# Allegro board test-bluetooth.brd
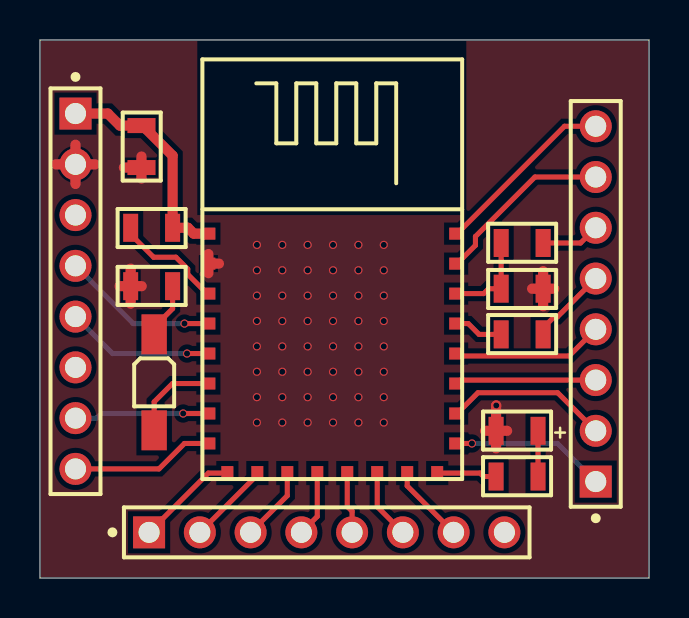
[diagram p0: board, top side]
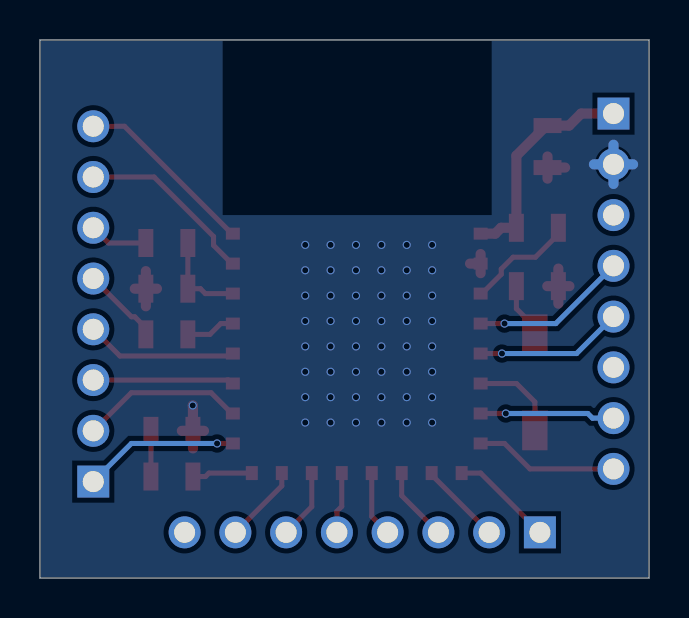
[diagram p1: board, bottom side, seen from below]

Outline 30.48 x 26.92 mm; copper layers: TOP, BOTTOM. Coordinates in mm from the lower left corner of the outline.
Outline path: 0,26.92 30.48,26.92 30.48,0 0,0 0,26.92

## Placement (name value [footprint] x y rotation side)
C1  0.1uF  [0805]  5.08 21.59 270 top
D1  LED  [0805]  23.88 7.37 0 top
J1  8 HEADER  [H-8]  1.78 23.24 270 top
J2  8 HEADER  [H-8]  27.81 4.83 90 top
J3  8 HEADER  [H-8]  5.46 2.29 0 top
R1  1K  [0805]  24.13 16.76 0 top
R2  10K  [0805]  5.59 17.53 180 top
R3  22  [0805]  24.13 12.19 0 top
R4  10K  [0805]  5.59 14.61 0 top
R5  2K  [0805]  24.13 14.48 180 top
R6  1K  [0805]  23.88 5.08 0 top
SW1  SW PUSHBUTTON  [KEY-3-6]  5.71 12.19 270 top
U1  -  [CC2540-MODULE]  8.13 4.95 0 top

## Library data of the parts
C1 = CAP NP
D1 = LED
J1-J3 = 8 HEADER
R1-R6 = R
SW1 = SW PUSHBUTTON
U1 = CC2540-MODULE

## Footprints (pads in the part's own frame, mm; a bottom-side part is the same pattern mirrored in y, then rotated)
0805
  rect 0.75x1.4 smd: 1(-1.05,0) 2(1.05,0)
CC2540-MODULE
  rect 0.7x0.6 smd: 1(0.3,12.28) 2(0.3,10.78) 3(0.3,9.28) 4(0.3,7.78) 5(0.3,6.28) 6(0.3,4.78) 7(0.3,3.28) 8(0.3,1.78) 17(12.7,1.78) 18(12.7,3.28) 19(12.7,4.78) 20(12.7,6.28) 21(12.7,7.78) 22(12.7,9.28) 23(12.7,10.78) 24(12.7,12.28)
  rect 0.6x0.7 smd: 9(1.25,0.3) 10(2.75,0.3) 11(4.25,0.3) 12(5.75,0.3) 13(7.25,0.3) 14(8.75,0.3) 15(10.25,0.3) 16(11.75,0.3)
H-8
  rect 1.6x1.6 hole 1.05: 1(0,0)
  round 1.6 hole 1.05: 2(2.54,0) 3(5.08,0) 4(7.62,0) 5(10.16,0) 6(12.7,0) 7(15.24,0) 8(17.78,0)
KEY-3-6
  rect 2x1.27 smd: 1(0,0) 2(4.8,0)

## Nets
GND: C1.2 D1.1(CATHODE) J1.2 R4.1 R5.1 U1.2(GND)
VDD3.3: C1.1 J1.1 R2.1 U1.1(VCC)
P0.0: J2.8 U1.24(P0.0)
P0.1: J2.7 U1.23(P0.1)
P0.4: J2.4 U1.20(P0.4)
P0.5: J2.3 U1.19(P0.5)
P0.6: J2.2 U1.18(P0.6)
P0.7: J2.1 U1.17(P0.7)
P1.6: J1.8 U1.8(P1.6)
P1.7: J1.7 U1.7(P1.7)
P2.1: J1.5 U1.5(P2.1/DD)
P2.2: J1.4 U1.4(P2.2/DC)
N00432: R2.2 U1.3(NRST)
N00495: SW1.2 U1.6(P2.0)
N00527: R4.2 SW1.1
N00595: R6.1 U1.16(P1.0)
N00680: R1.1 R5.2 U1.22(RX/P0.2)
N00684: R3.1 U1.21(TX/P0.3)
N00768: D1.2(ANODE) R6.2
N01274: J3.1 U1.9(USB+/SCL)
N01286: J3.2 U1.10(USB-/SDA)
N01298: J3.3 U1.11(P1.5)
N01310: J3.4 U1.12(P1.4)
N01322: J3.5 U1.13(P1.3)
N01334: J3.6 U1.14(P1.2)
N01346: J3.7 U1.15(P1.1)
N02048: J2.6 R1.2
N02052: J2.5 R3.2

Pads without a net: J1 3 6; J3 8

## Via types
v1: diameter 0.406, hole 0.305, TOP to BOTTOM, 53 vias

## Routing (per net, layer and track width the routed paths; a pad name or vN(x,y) marks a point on that pad's centre or on a via; arc(x,y) is an arc through that point)
GND: length 20.3
  TOP w0.508: 4.54,13.73 R4.1 ; R4.1 5.09,14.61 ; R4.1 4.54,15.48 ; R4.1 3.98,14.61 ; v1(22.83,8.64) 22.83,8.63 D1.1 ; 24.63,14.48 R5.1 ; R5.1 25.18,15.36 ; R5.1 25.18,13.6 ; R5.1 25.73,14.48 ; C1.2 5.08,21.09 ; C1.2 4.2,20.54 ; C1.2 5.08,19.99 ; 1.78,19.72 J1.2 ; J1.2 1.78,21.68 ; J1.2 0.8,20.7 ; J1.2 2.76,20.7 ; D1.1 23.38,7.37 ; D1.1 22.83,6.49 ; D1.1 22.27,7.37 ; U1.2 8.43,16.21 ; U1.2 8.43,15.25 ; U1.2 8.96,15.73
  BOTTOM w0.508: J1.2 1.78,21.68 ; J1.2 0.8,20.7 ; J1.2 2.76,20.7 ; J1.2 1.78,19.72
  vias: v1(10.86,16.67) v1(10.86,15.4) v1(10.86,14.13) v1(10.86,12.86) v1(10.86,11.59) v1(10.86,10.32) v1(10.86,9.05) v1(10.86,7.78) v1(12.13,16.67) v1(12.13,15.4) v1(12.13,14.13) v1(12.13,12.86) v1(12.13,11.59) v1(12.13,10.32) v1(12.13,9.05) v1(12.13,7.78) v1(13.4,16.67) v1(13.4,15.4) v1(13.4,14.13) v1(13.4,12.86) v1(13.4,11.59) v1(13.4,10.32) v1(13.4,9.05) v1(13.4,7.78) v1(14.67,16.67) v1(14.67,15.4) v1(14.67,14.13) v1(14.67,12.86) v1(14.67,11.59) v1(14.67,10.32) v1(14.67,9.05) v1(14.67,7.78) v1(15.94,16.67) v1(15.94,15.4) v1(15.94,14.13) v1(15.94,12.86) v1(15.94,11.59) v1(15.94,10.32) v1(15.94,9.05) v1(15.94,7.78) v1(17.21,16.67) v1(17.21,15.4) v1(17.21,14.13) v1(17.21,12.86) v1(17.21,11.59) v1(17.21,10.32) v1(17.21,9.05) v1(17.21,7.78)
VDD3.3: length 11.3
  TOP w0.508: J1.1 3.4,23.24 4,22.64 C1.1 5.13,22.64 6.64,21.13 R2.1 7.4,17.53 7.7,17.23 U1.1
P0.0: length 9.2
  TOP w0.254: U1.24 20.88,17.23 26.25,22.61 J2.8
P0.1: length 9
  TOP w0.254: J2.7 24.77,20.07 21.79,17.09 21.79,16.65 20.88,15.73 U1.23
P0.4: length 7.6
  TOP w0.254: U1.20 20.88,11.23 21,11.11 26.48,11.11 J2.4
P0.5: length 7.1
  TOP w0.254: U1.19 20.88,9.73 21.05,9.91 J2.3
P0.6: length 8.2
  TOP w0.254: U1.18 20.88,8.23 21.92,9.27 25.91,9.27 J2.2
P0.7: length 7.8
  TOP w0.254: U1.17 v1(21.62,6.73)
  BOTTOM w0.254: J2.1 25.91,6.73 v1(21.62,6.73)
P1.6: length 7.2
  TOP w0.254: J1.8 5.96,5.46 7.23,6.73 U1.8
P1.7: length 6.7
  TOP w0.254: U1.7 v1(7.17,8.23)
  BOTTOM w0.254: v1(7.17,8.23) 3.06,8.23 2.83,8 J1.7
P2.1: length 7.4
  TOP w0.254: U1.5 v1(7.36,11.23)
  BOTTOM w0.254: J1.5 3.63,11.23 v1(7.36,11.23)
P2.2: length 7.8
  TOP w0.254: U1.4 v1(7.23,12.73)
  BOTTOM w0.254: v1(7.23,12.73) 4.67,12.73 J1.4
N00432: length 5.6
  TOP w0.254: R2.2 4.54,17.2 5.69,16.05 6.8,16.05 7.39,15.46 7.39,15.2 8.39,14.2 U1.3
N00495: length 4.5
  TOP w0.254: U1.6 6.63,9.73 5.71,8.81 SW1.2
N00527: length 2.8
  TOP w0.254: SW1.1 5.71,12.56 6.64,13.48 R4.2
N00595: length 3
  TOP w0.254: R6.1 22.2,5.08 22.02,5.25 U1.16
N00680: length 4.6
  TOP w0.254: R1.1 R5.2 22.45,14.48 22.21,14.23 U1.22
N00684: length 2.5
  TOP w0.254: U1.21 21.43,12.73 21.97,12.19 R3.1
N00768: length 2.3
  TOP w0.254: R6.2 D1.2
N01274: length 5.1
  TOP w0.254: U1.9 8.43,5.25 J3.1
N01286: length 4.2
  TOP w0.254: U1.10 10.88,5.16 8,2.29
N01298: length 3.7
  TOP w0.254: U1.11 12.38,4.12 J3.3
N01310: length 3.3
  TOP w0.254: J3.4 13.88,3.08 U1.12
N01322: length 3.1
  TOP w0.254: J3.5 15.62,3.34 15.38,3.58 U1.13
N01334: length 3.5
  TOP w0.254: U1.14 16.88,3.57 J3.6
N01346: length 3.9
  TOP w0.254: J3.7 18.38,4.61 U1.15
N02048: length 2.9
  TOP w0.254: J2.6 27.05,16.76 R1.2
N02052: length 4
  TOP w0.254: J2.5 25.9,13.07 25.74,13.07 25.18,12.52 R3.2

## Copper pours and planes (outline as drawn; the poured copper is in the pictures)
GND on TOP, BOTTOM: 0.05,0.05 0.05,26.87 7.87,26.87 7.87,18.16 21.34,18.16 21.34,26.87 30.43,26.87 30.43,0.05

## Text on the board
Ref Des/Silkscreen Top: +
PLACE_BOUND_TOP: FIGURE | SIZE | 12.0 | 41.34 | DRILL CHART: TOP to BOTTOM | ALL UNITS ARE IN MILS | PLATED | QTY | 53 | 24
